# Altium PCB First.PcbDoc
Units mil, origin at the board's own origin, x right, y up, seen from the top; angles counter-clockwise.
Board outline 3000 x 1900 mil, 2 copper layers (Top Layer, Bottom Layer); 14 components, 8 nets, 38 pads, 6 vias.
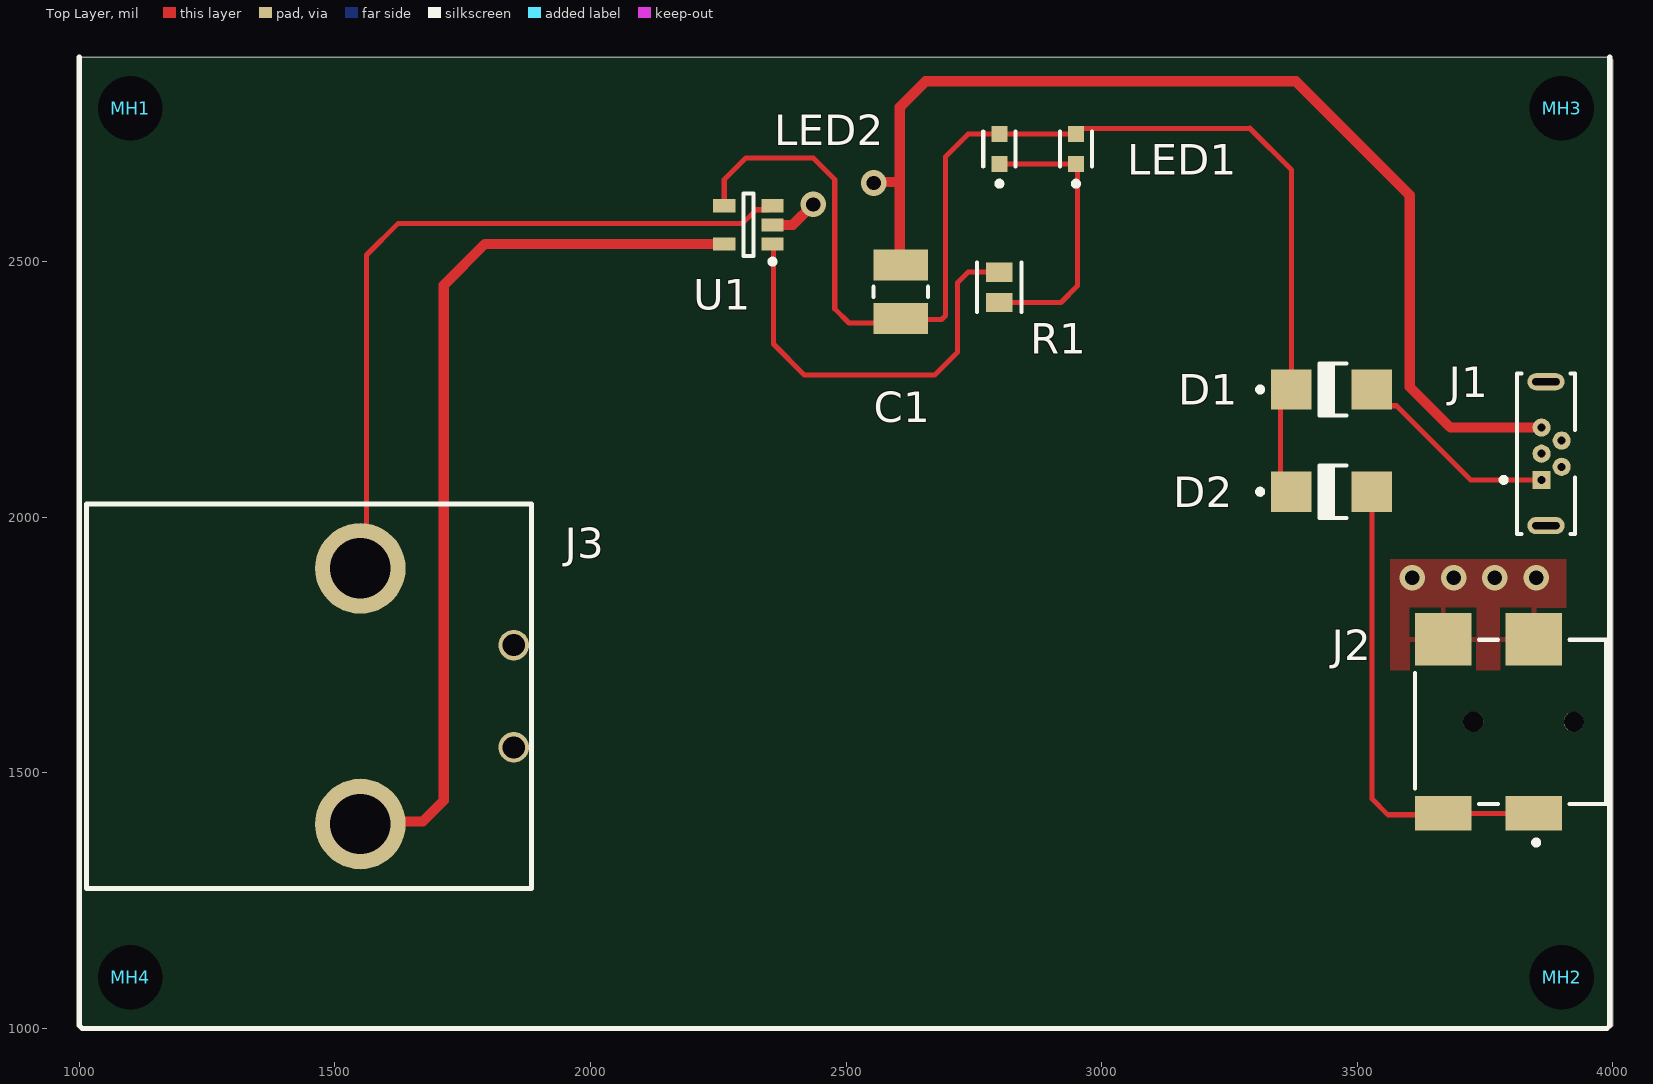
[diagram p0: Top Layer view]
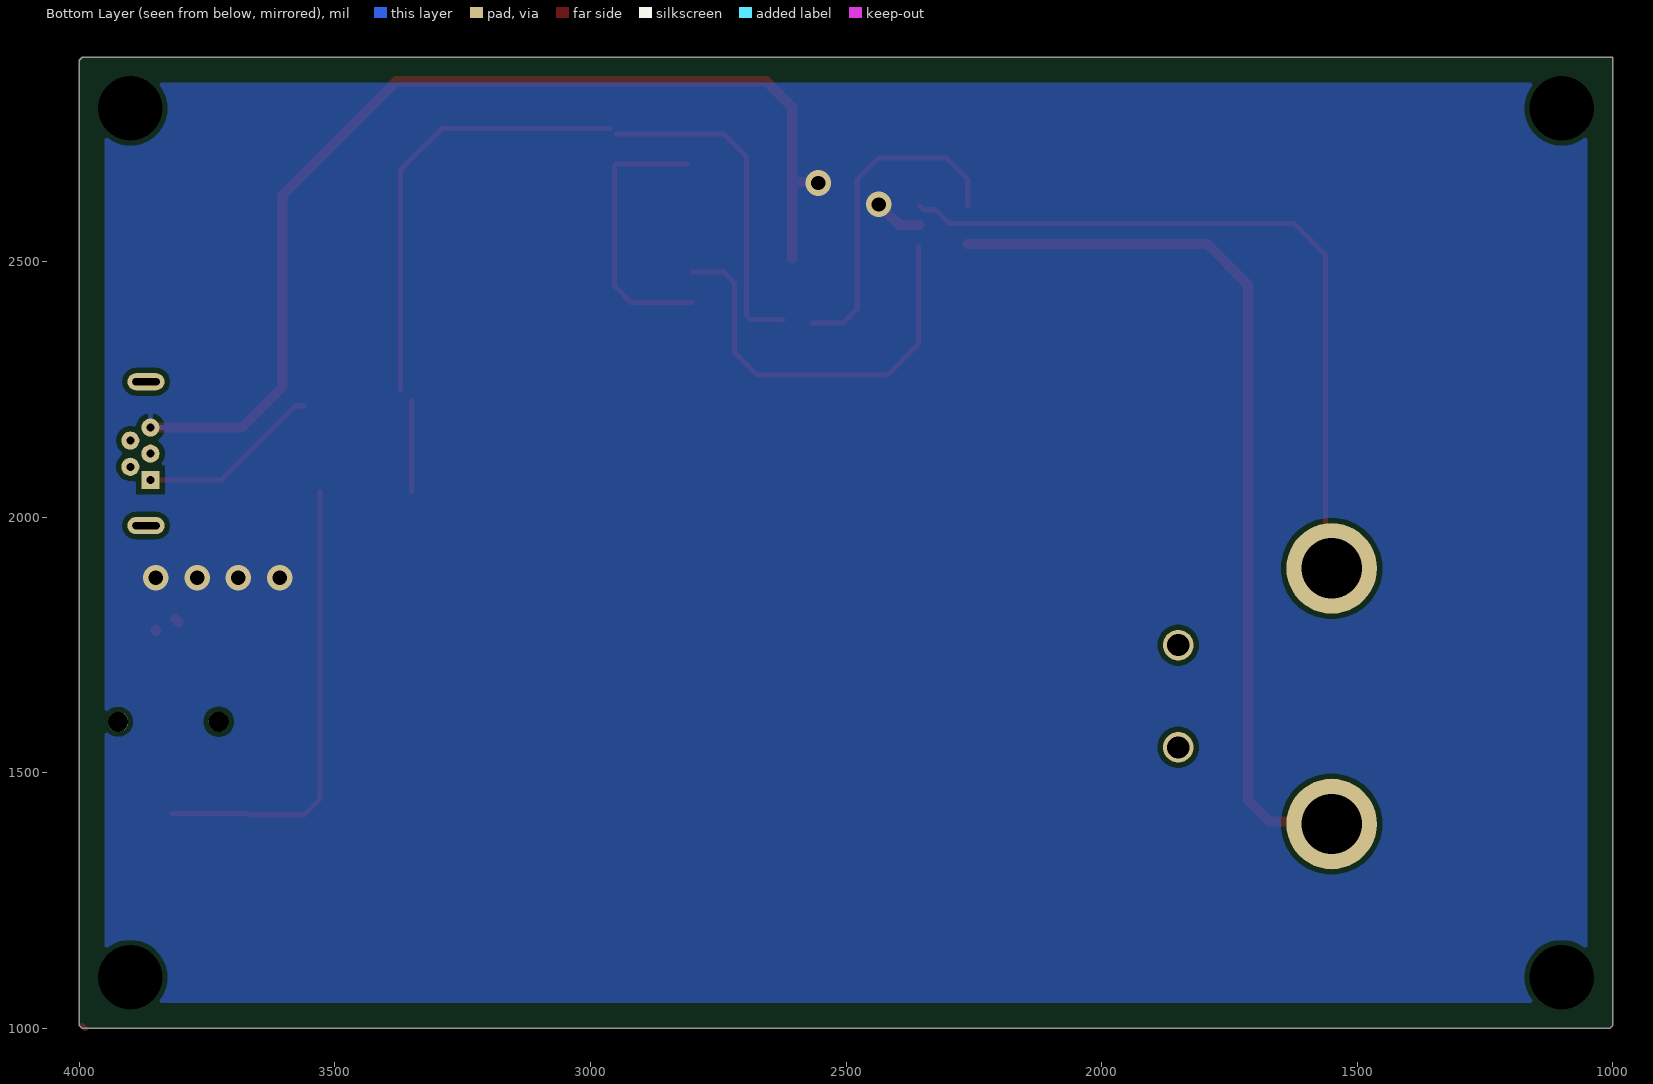
[diagram p1: Bottom Layer view, seen from below]
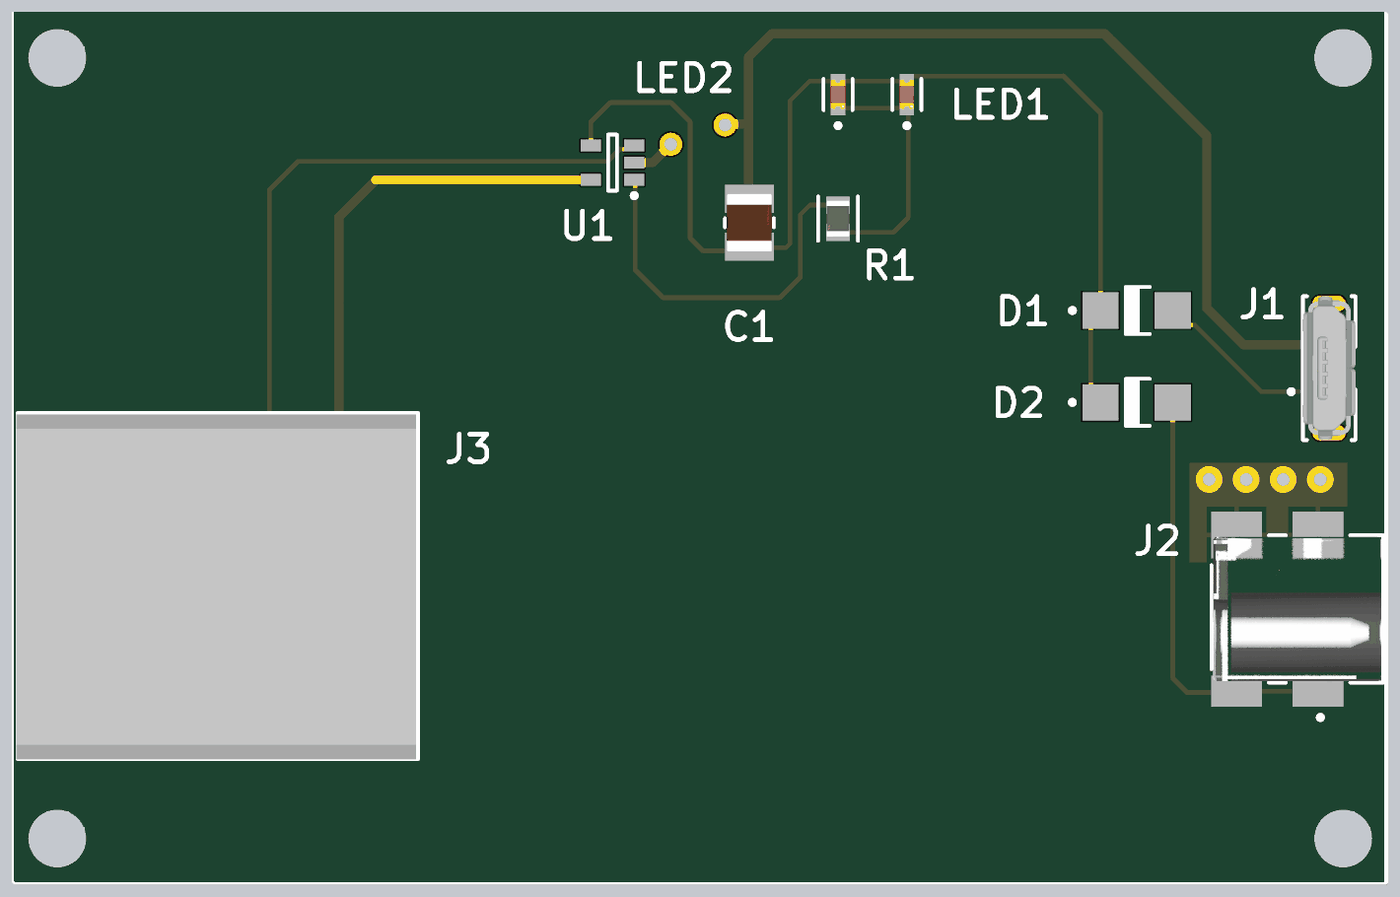
[diagram p2: 3D render of the assembled board from above, using the file's embedded part models]

## Layer stack, top to bottom
Top Solder: solder mask 0.4, Solder Resist, Dk 3.5
Top Layer: signal copper 1.4
Dielectric 1: dielectric 12.6, FR-4, Dk 4.8
Bottom Layer: signal copper 1.4
Bottom Solder: solder mask 0.4, Solder Resist, Dk 3.5

## Board outline
1005.86,1000 1000,1005.86 1000,2900 3994.14,2900 4000,2894.14 4000,1005.86 3994.14,1000

## Design rules (kind name [scope] priority, off if disabled: settings)
Clearance [All] p1: gap=10 ignorepadtopadclearanceinfootprint=FALSE except(0: Arc-Hole Track-Hole SMDPad-Hole THPad-Hole Via-Hole Fill-Hole Poly-Hole Region-Hole Text-Hole)
PolygonConnect [All] p1: connectstyle=Relief reliefconductorwidth=10 reliefentries=4 polygonreliefangle="90 Angle" airgapwidth=10
RoutingVias [All] p1: holewidth=28 width=50 viastyle="Through Hole" minholewidth=28 minwidth=50 maxholewidth=28 maxwidth=50
SolderMaskExpansion [All] p1: expansion=4 istentingtop=FALSE
Width [All] p1: maxlimit=40 minlimit=10 preferedwidth=10
30 further rules are at their usual default settings.

## Components (designator, comment, footprint, x,y, rotation, side; value= is the part's Value field where it differs from the comment)
C1 "EMK325B7475MN-T" FP-1210-L_3_2_0_3-W_2_5_0-IPC_B 2607,2441.18 r90 top
D1 "MBRA140T3G" ONSC-SMA-2-403D-02_V 3450,2250 r0 top
D2 "MBRA140T3G" ONSC-SMA-2-403D-02_V 3450,2050 r0 top
J1 "USB3105-30-A" GCT-USB3105-30-A_V 3880.32,2124.41 r90 top locked
J2 "PJ-018H-SMT-TR" FP-PJ-018H-SMT-TR-MFG 3800,1600 r180 top locked
J3 "CONN HEADER R/A 2POS 5.08MM" 1-179276-2 1550,1900 r270 top locked
LED1 "SML-LX0603SIW-TR" FP-SML-LX0603SIW-TR-MFG 2950,2720.47 r90 top (schematic designator D4)
LED2 "SML-LX0603SIW-TR" FP-SML-LX0603SIW-TR-MFG 2800,2720.47 r90 top (schematic designator D3)
MH1 "Mounting Hole Non Plated" "Mounting Hole" 1100,2800 r0 top locked
MH2 "Mounting Hole Non Plated" "Mounting Hole" 3900,1100 r0 top locked
MH3 "Mounting Hole Non Plated" "Mounting Hole" 3900,2800 r0 top locked
MH4 "Mounting Hole Non Plated" "Mounting Hole" 1100,1100 r0 top locked
R1 "TFCR0805-10W-E-2001BT" FP-TFCR0805-IPC_C 2800,2450 r90 top
U1 "ESP32-PICO-V3" SOT-23-OT5_N 2309,2572 r180 top

## Footprints (in the part's own frame and the unit in brackets; to place one, negate y for a bottom-side part, rotate by r counter-clockwise, add the part's x,y. Pads: shape width x height; smd on the part's side, far side on the other; paste and mask are expansions set on the pad)
1-179276-2 [mm] "2_POS_HDR"
  round 4.5 hole 3: 1(0,0) 2(12.7,0)
  round 1.524 hole 1.1: 3(8.89,7.62) 4(3.81,7.62)
  silkscreen extent -3.2,-13.6 15.9,8.5, body extent -3.14,-13.7 15.94,8.4, height 11.85
FP-1210-L_3_2_0_3-W_2_5_0-IPC_B [mil]
  rect 61.15x106.54 smd paste+0 mask+0: 1(-52.18,0) 2(52.18,0)
  silkscreen extent -10,-53 10,53, body extent -93,-63 93,63, height 10
FP-PJ-018H-SMT-TR-MFG [mm]
  rect 2.8x1.7 smd paste+0 mask+0: 1(-1.15,4.55) 1(3.35,4.55)
  rect 2.8x2.6 smd paste+0 mask+0: 2(-1.15,-4.1) 3(3.35,-4.1)
  round 1 hole 1 unplated paste-1000 mask+0: ""(-3.15,0) ""(1.85,0)
  silkscreen extent -4.75,-4.08 4.75,6.12, body extent -4.85,-5.5 4.85,5.5, height 0.25
FP-SML-LX0603SIW-TR-MFG [mm]
  rect 0.8x0.8 smd paste+0 mask+0: 1(-0.75,0) 2(0.75,0)
  silkscreen extent -1.85,-0.8 0.86,0.8, body extent -1.25,-0.56 1.25,0.56, height 0.25
FP-TFCR0805-IPC_C [mil]
  rect 37.63x51.5 smd paste+0 mask+0: 1(-29.58,0) 2(29.58,0)
  silkscreen extent -48,-43 48,43, body extent -52,-31 52,31, height 10
GCT-USB3105-30-A_V [mm] "THD, 5-Leads, Body 7.96x2.9mm, Pitch 0.65mm"
  rect 0.9x0.9 hole 0.4: 1(-1.3,0.5)
  round 0.9 hole 0.4: 2(-0.65,-0.5) 3(0,0.5) 4(0.65,-0.5) 5(1.3,0.5)
  oval 0.85x1.85 hole 0.35 slot 1.35 at 90 deg: 6(-3.575,0.28) 7(3.575,0.28)
  silkscreen extent -3.98,-1.17 3.98,2.5, body extent -3.98,-1.18 3.98,1.75, height 5.61
"Mounting Hole" [mm] "Mounting Hole 3.2mm"
  round 1 hole 3.2 unplated: ""(0,0)
ONSC-SMA-2-403D-02_V [mm] "Molded, 2-Leads, Body 4.57x2.92mm"
  rect 2x2 smd: 1(-2,0) 2(2,0)
  silkscreen extent -3.67,-1.3 0.74,1.3, body extent -2.16,-1.3 2.16,1.3, height 2.2
SOT-23-OT5_N [mm] "SOT23, 5-Leads, Body 2.9x1.7mm, Pitch 0.95mm, Lead Span 2.8mm, IPC Medium Density"
  rect 1.1x0.65 smd: 1(-1.2,0.95) 2(-1.2,0) 3(-1.2,-0.95) 4(1.2,-0.95) 5(1.2,0.95)
  silkscreen extent -1.33,-1.55 0.25,1.95, body extent -0.9,-1.55 0.9,1.55, height 1.45

## Part data
C1: library part CMP-14477-000959-2, "None", Capacitance=4.7uF, Case Code (Imperial)=1210, Case Code (Metric)=3225, Dielectric=X7R, Dielectric Material=Ceramic, Max Operating Temperature=125°C, Min Operating Temperature=-55°C, Package Quantity=2000, Tolerance=20%, Voltage=16V, Case/Package=1210, Construction=Flat, Depth=2.5mm, Halogen Free="Halogen Free", Height=1.9mm, Lead Free="Lead Free", Length=3.2mm, Mount="Surface Mount", Number of Pins=2, Packaging="Tape and Reel", Radiation Hardening=No, Resistor Type=Ceramic, RoHS Compliant=Yes, Series=M, Termination=SMD/SMT, Thickness=0.083inch, Voltage Rating=16V, Voltage Rating (DC)=16V, Weight=0.000564oz, Width=0.098inch
D1 D2: library part CMP-1055-00320-1, "Schottky Power Rectifier, 2-Pin SMA, Pb-Free, Tape and Reel", Manufacturer="On Semiconductor", ComponentLink1Description="Manufacturer URL", ComponentLink1URL=http://www.onsemi.com/, ComponentLink2Description=Datasheet, ComponentLink2URL=http://www.onsemi.cn/pub_link/Collateral/MBRA140T3-D.PDF, ComponentLink3Description="Package Specification", ComponentLink3URL=http://www.onsemi.com/pub_link/Collateral/403D-02.PDF, Configuration=Single, DatasheetVersion="Rev. 10", IFSM Max (A)=30, Mounting Technology="Surface Mount", PackageDescription="2-Pin Small Molded Package, J-Bend Lead, Body 2.605 x 4.315 mm", PackageReference=SMA-2-403D-02, PackageVersion="Rev. G, 07/2012", Packing="Tape and Reel", PartNumber=MBRA140T3G, RoHS=TRUE
J1: library part CMP-2000-07366-1, "USB 2.0 A/B Receptacle, 30 V, -55 to 85 degC, 5-Pin THD, RoHS, Tape and Reel", Manufacturer="Global Connector Technology", Package Description="5-Pin Through Hole Device, Body 7.96 x 2.9 mm, Pitch 0.65 mm", Connector Mounting=ThroughHoleMount, Contact Material=CopperAlloy, Contact Plating=GoldPlatedContacts, Datasheet URL=http://gct.co/usb-connectors/pdf/USB3105.pdf, Datasheet Version="Rev. F, 05/2015", Gender=Receptacle, Manufacturer URL=http://gct.co/, Mounting Technology=ThroughHole, No. of Positions=5Ways, Orientation=Vertical, Package Reference=USB3105-30-A, Product Range=-, USB Connector Type=MicroUSBTypeAB, USB Standard=USB2.0
J2: library part CMP-14830-000007-1, "CONN PWR JACK 1.7X4MM SOLDER", Current Rating=5A, Manufacturer=CUI, Package=0, Temperature="-25°C to +85°C", Temperature Range High=+85°C, Temperature Range Low=-25°C, Voltage Rating=24V, Automotive=No, Category=Conn, ComponentLink2Description=Datasheet, ComponentLink2URL=https://www.cuidevices.com/product/resource/pj-018h-smt-tr.pdf, Conn Gender=Male, Conn Orientation="Right Angle", Contact Material=Nickel,Silver, Device Class L1=Connectors, Device Class L2="Power Connectors", Device Class L3=unset, Digikey Description="CONN PWR JACK 1.7X4MM SOLDER", Height=5.6mm, Lead Free=Yes, Manufacturer Part Number=PJ-018H-SMT-TR, Mouser Description="DC Power Connectors Power Jacks", Number Of Contacts=1, Octopart=https://octopart.com/pj-018h-smt-tr-cui-25947163, RoHS=TRUE, Standoff Height=0.1mm
J3: library part 1-179276-2, "Connector Header Through Hole, Right Angle 2 position 0.200\" (5.08mm)", Manufacturer="TE Connectivity AMP Connectors", Manufecturer Part Number=1-179276-2
LED1 LED2: library part CMP-57192-000009-1, "LED RED DIFFUSED SMD", Case Code (Imperial)=0603, Case Code (Metric)=1608, Color=Red, Forward Current=20mA, Forward Voltage=2V, Lens Color=White, Max Operating Temperature=85°C, Min Operating Temperature=-25°C, Package Quantity=1, Power Rating=50mW, Approvals=UL, Case/Package=0603, Dominant Wavelength=636nm, Height=0.6mm, Illumination Color=Red, Lead Free="Lead Free", Length=1.6mm, Lens Style=Diffused, Lens Transparency=Diffused, Luminous Intensity=60mcd, Moisture Sensitivity Level=2, Mount="Surface Mount", Number of LEDs=1, Number of Pins=2, Packaging="Tape and Reel", REACH SVHC="No SVHC", RoHS Compliant=Yes, Test Current=20mA, Viewing Angle=140°, Wavelength=636nm, Width=0.8mm
MH1 MH2 MH3 MH4: library part "Mounting Hole"
R1: library part CMP-2002-07985-1, Manufacturer="Yageo / Phycomp", Part Number=RC0402JR-07330RL
U1: library part CMP-0133-00136-1, "Miniature Single-Cell, Fully Integrated Li-Ion, Li-Polymer Charge Management Controller, 4.5V, 5-Pin SOT-23, Industrial Temperature, Tape and Reel", Code_IPC=SOT23-5, DatasheetVersion="revE, Sep-2008", PackageDescription="5-Lead Plastic Small Outline Transistor (OT) [SOT-23]", PackageReference=SOT-23-OT5, PackageVersion="revBB, Aug-2009"

## Via types
v1: diameter 50, hole 28, Top Layer to Bottom Layer, 6 vias

## Nets (pads, with @x,y where several pads share a name; then routed paths per layer and width w, separated by ;. In a path a pad name is that pad's centre, name@x,y a point inside that pad or via, vN(x,y) a via of type N, cw(c..) or ccw(c..) an arc to the next point about the centre after c; other vN are vias at no path point)
GND: C1.2 J1.5 J2.2 J2.3 U1.2 | length 2229.1
  Top Layer w20: U1.2 2396,2572 v1(2436,2612) ; v1(2554,2654) 2556,2656 2601,2656 ; C1.2@2605,2506 2605,2802 ; 2606,2801 2606,2803 2656,2853 3380,2853 3603,2630 3603,2255 3682.41,2175.59 J1.5 ; J2.2@3806,1795 J2.2@3812,1801 ; J2.2@3849,1778 J2.2@3851,1780
  other v1: 3608,1882 3688.67,1882 3769.33,1882 3850,1882
NetC1_1: C1.1 D1.1 D2.1 LED1.2 LED2.2 U1.4 | length 2367.9
  Top Layer w10: U1.4 2261.76,2660.76 2304,2703 2436,2703 2478,2661 2478,2408 2506,2380 C1.1@2566,2380 ; C1.1@2623,2386 2624,2387 2687,2387 2695,2395 2695,2706 2739,2750 LED2.2 LED1.2 ; LED1.2@2960.75,2760.75 3290.25,2760.75 ; 3290,2761 3290.25,2760.75 ; D2.1@3350,2050 D1.1@3350,2228.74 ; D1.1 3371.26,2679.74 3290.25,2760.75
NetD1_2: D1.2 J1.1 | length 360.1
  Top Layer w10: D1.2@3560.59,2218.15 3576.85,2218.15 3721.77,2073.23 J1.1
NetD2_2: D2.2 J2.1 | length 903.1
  Top Layer w10: D2.2 3528.74,1449.26 3560,1418 J2.1@3668.11,1418 ; J2.1@3668.11,1420.87 J2.1@3818.13,1420.87
NetJ3_1: J3.1 U1.3 | length 1406.2
  Top Layer w10: J3.1@1562,1941 1562,2513 1624,2575 2298,2575 2324.61,2601.61 2348.45,2601.61 U1.3
NetJ3_2: J3.2 U1.5 | length 1786.1
  Top Layer w20: J3.2@1534,1405 1672,1405 1713,1446 1713,2454 1793.6,2534.6 U1.5
NetLED1_1: LED1.1 LED2.1 R1.1 | length 540.9
  Top Layer w10: R1.1 2920.42,2420.42 2952.72,2452.72 LED1.1@2952.72,2688.23 ; LED2.1@2810.75,2690.94 LED1.1
NetR1_2: R1.2 U1.1 | length 821.8
  Top Layer w10: U1.1@2359,2530 2358,2529 2358,2339 2419,2278 2673,2278 2718,2323 2718,2459 2738.58,2479.58 R1.2
pads on no net: J1.2 J1.3 J1.4 J1.6 J1.7 J2. J3.3 J3.4 MH1. MH2. MH3. MH4.
copper on no net: | length 8.3
  Top Layer w10: 3988.28,1000 3994.14,1005.86

## Polygon pours and split planes (outlines as drawn)
GND on Bottom Layer "GND_L02_P000" (solid, pour order 0): 1050,2850 3950,2850 3950,1050 1050,1050
GND on Top Layer "GND_L01_P001" (solid, pour order 1): 3909,1918 3565,1918 3565,1701 3909,1701

## Silkscreen, mask and mechanical layers (free items; w line width, h text height)
Top Overlay:
  lines w10: 1000,2900 1000,1005.86 1005.86,1000 3988.28,1000 ; 3994.14,1005.86 3994.14,2900